# EAGLE board Super-Regenerative-FM (EAGLE 7.2.0)
Super-Regen FM Radio: "Radio Shack Special" http://ryanzachry.com/2013/01/super-regen-fm-radio/ http://electronics-diy.com/simple-fm-radio.php
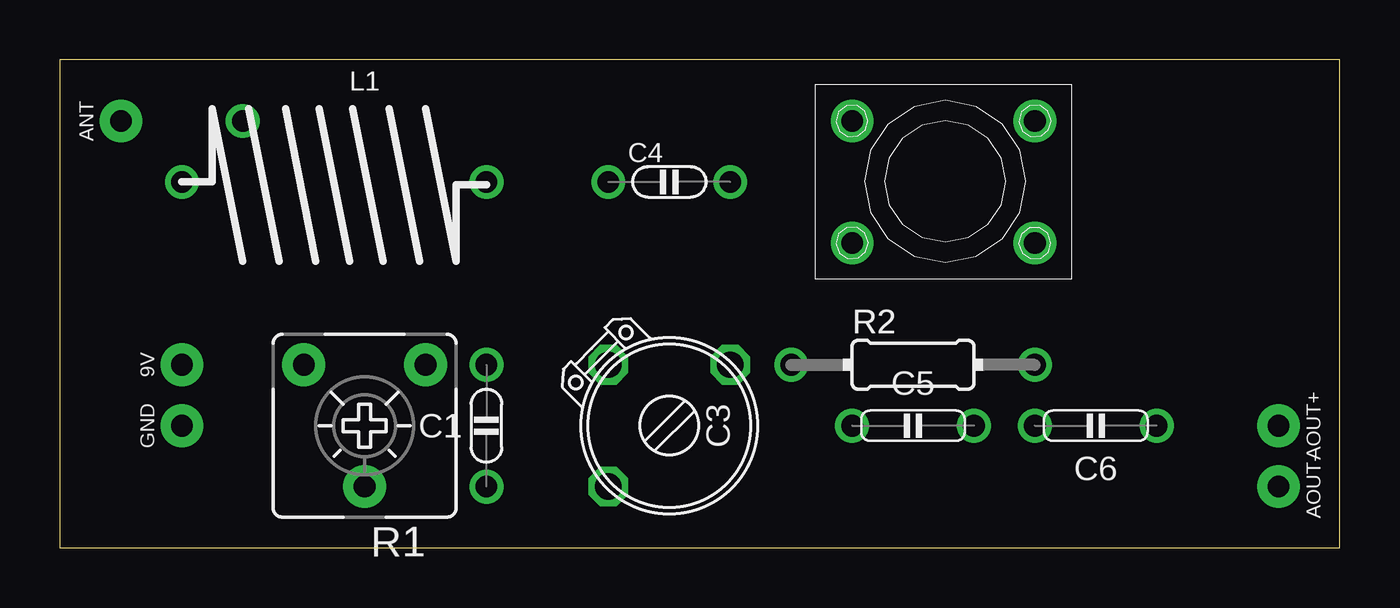
[diagram p0: board, top side]
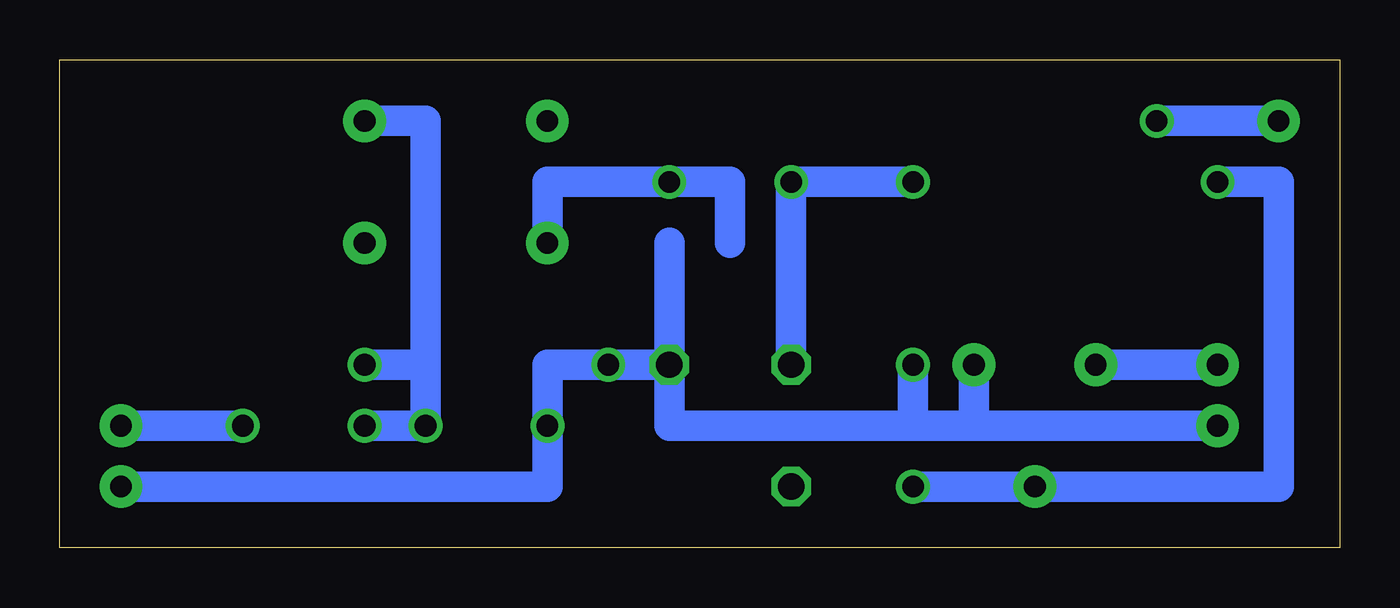
[diagram p1: board, bottom side, seen from below]

Size 53.34 x 20.32 mm. Coordinates in mm from the lower left corner, seen from the top.
Outline: 0,0 53.34,0 53.34,20.32 0,20.32 0,0
Copper layers (1*16): Top 0.035mm / dielectric 1.5mm / Bottom 0.035mm
Design rules "default": minimum track width 10mil, minimum drill 24mil, track to track 8mil, track to pad 8mil, pad to pad 8mil, via to via 8mil, smd to smd 8mil, copper to edge 40mil, drill to drill 8mil, minimum pad ring 10mil, minimum via ring 8mil, stop-mask expansion 4mil, vias tented up to drill 0mil, thermal gap 10mil
Net classes: 0 default: width 0.61 mm

## Footprints (pad centres in the part's own frame; a part is rotated, then mirrored left to right if it is on the bottom)
SPAD = drill 0.9 pad 1.778: 1 0,0
C050-020X036/V = drill 0.9: 1 0,-2.54; 2 0,2.54
TRIM-2222-808 = drill 1.1 octagon: 1 -2.54,2.54; 2 -2.54,-2.54; 3 2.54,-2.54
C050-020X036 = drill 0.9: 1 -2.54,0; 2 2.54,0
C050-020X044 = drill 0.9: 1 2.54,0; 2 -2.54,0
L-08/12-X-TAP1 = drill 0.9: 1 -6.35,0; 2 6.35,0; 3 -3.81,2.54
L-BODY = drill 0.9 pad 1.778: 1 -3.81,2.54; 2 3.81,2.54; 3 -3.81,-2.54; 4 3.81,-2.54
POT-V = drill 0.9 pad 1.778: A -2.54,-2.54; E 2.54,-2.54; S 0,2.54
0204/10 = drill 0.9: 1 -5.08,0; 2 5.08,0

## Placement (x,y rotation side)
9V  SPAD  [SPAD]  5.08,7.62 0 top
ANT  ANT  [SPAD]  2.54,17.78 0 top
AOUT+  SPAD  [SPAD]  50.8,5.08 180 top
AOUT-  SPAD  [SPAD]  50.8,2.54 180 top
C1  1n  [C050-020X036/V]  17.78,5.08 0 top
C3  15p  [TRIM-2222-808]  25.4,5.08 270 top
C4  4.7pF  [C050-020X036]  25.4,15.24 0 top
C5  4.7n  [C050-020X044]  35.56,5.08 0 top
C6  100n  [C050-020X044]  43.18,5.08 180 top
GND  SPAD  [SPAD]  5.08,5.08 0 top
L1  0.22μH  [L-08/12-X-TAP1]  11.43,15.24 0 top
L2  3.3μH  [L-BODY]  36.83,15.24 0 top
R1  1kΩ  [POT-V]  12.7,5.08 180 top
R2  10kΩ  [0204/10]  35.56,7.62 0 top

## Library data of the parts
9V ANT AOUT+ AOUT- GND = pad
C1 C4-C6 = c
C3 = cap-trim
L1 L2 = l
R1 R2 = r

## Nets
GND: AOUT-.1 C1.2 C3.1 C5.2 GND.1 R1.A R2.1
N$1: 9V.1 R1.E
N$2: C3.2 C4.1 L1.2
N$3: C1.1 L1.1 R1.S
N$4: ANT.1 L1.3
N$5: C4.2 L2.3
N$6: C5.1 C6.1 L2.2 R2.2
N$8: AOUT+.1 C6.2

## Tracks (layer width: path | path; a pad name or v marks a point on that pad's centre or on a via)
GND
  Bottom 1.27: 17.78,5.08 27.94,5.08 C3.1 | 15.24,6.35 R1.A 15.24,5.08 | 15.24,5.08 GND.1 | AOUT-.1 33.02,2.54 C5.2 33.02,7.62 R2.1 C3.1 | 27.94,12.7 C3.1 | 15.24,5.08 17.78,5.08 | 17.78,5.08 C1.2
N$1
  Bottom 1.27: 9V.1 R1.E
N$2
  Bottom 1.27: C3.2 22.86,12.7 C4.1 L1.2
N$3
  Bottom 1.27: C1.1 R1.S 2.54,2.54 2.54,15.24 L1.1
N$4
  Bottom 1.27: ANT.1 L1.3
N$5
  Bottom 1.27: 25.4,12.7 25.4,15.24 C4.2 33.02,15.24 L2.3
N$6
  Bottom 1.27: L2.2 38.1,17.78 38.1,7.62 | C6.1 C5.1 38.1,7.62 | 38.1,7.62 R2.2
N$8
  Bottom 1.27: C6.2 AOUT+.1